# EAGLE board PANEL (EAGLE 6.3)
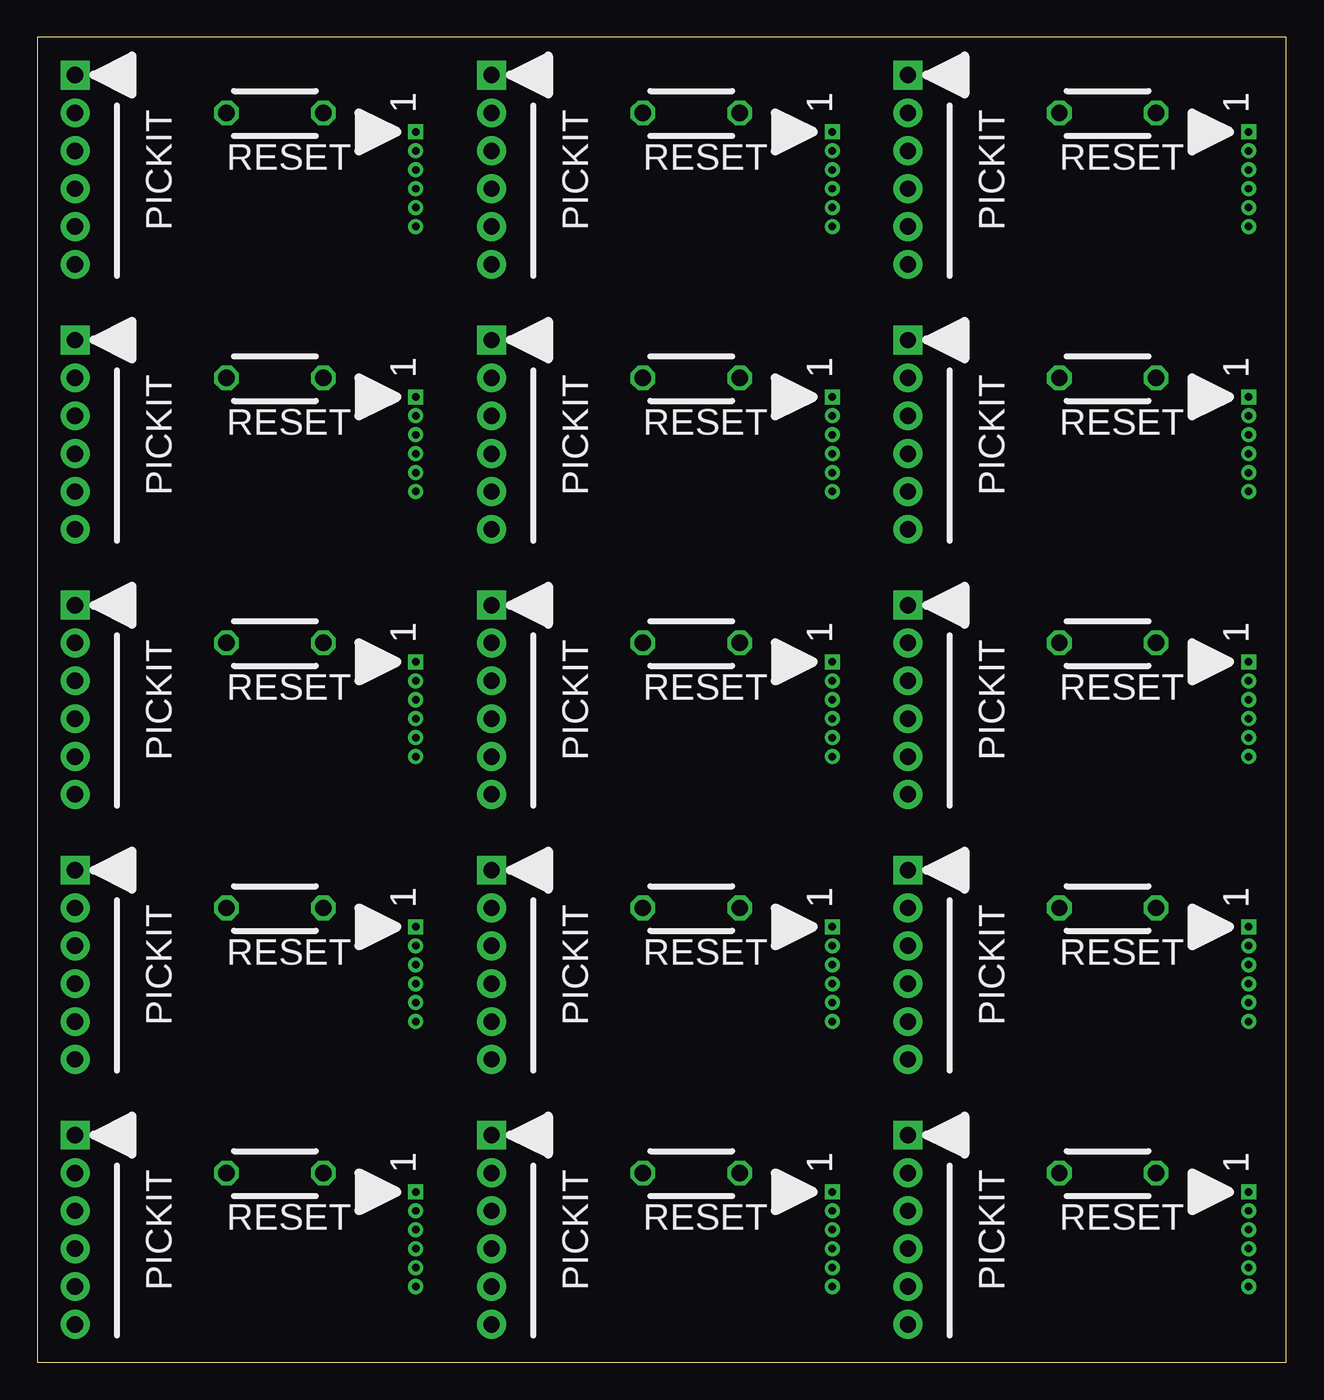
[diagram p0: board, top side]
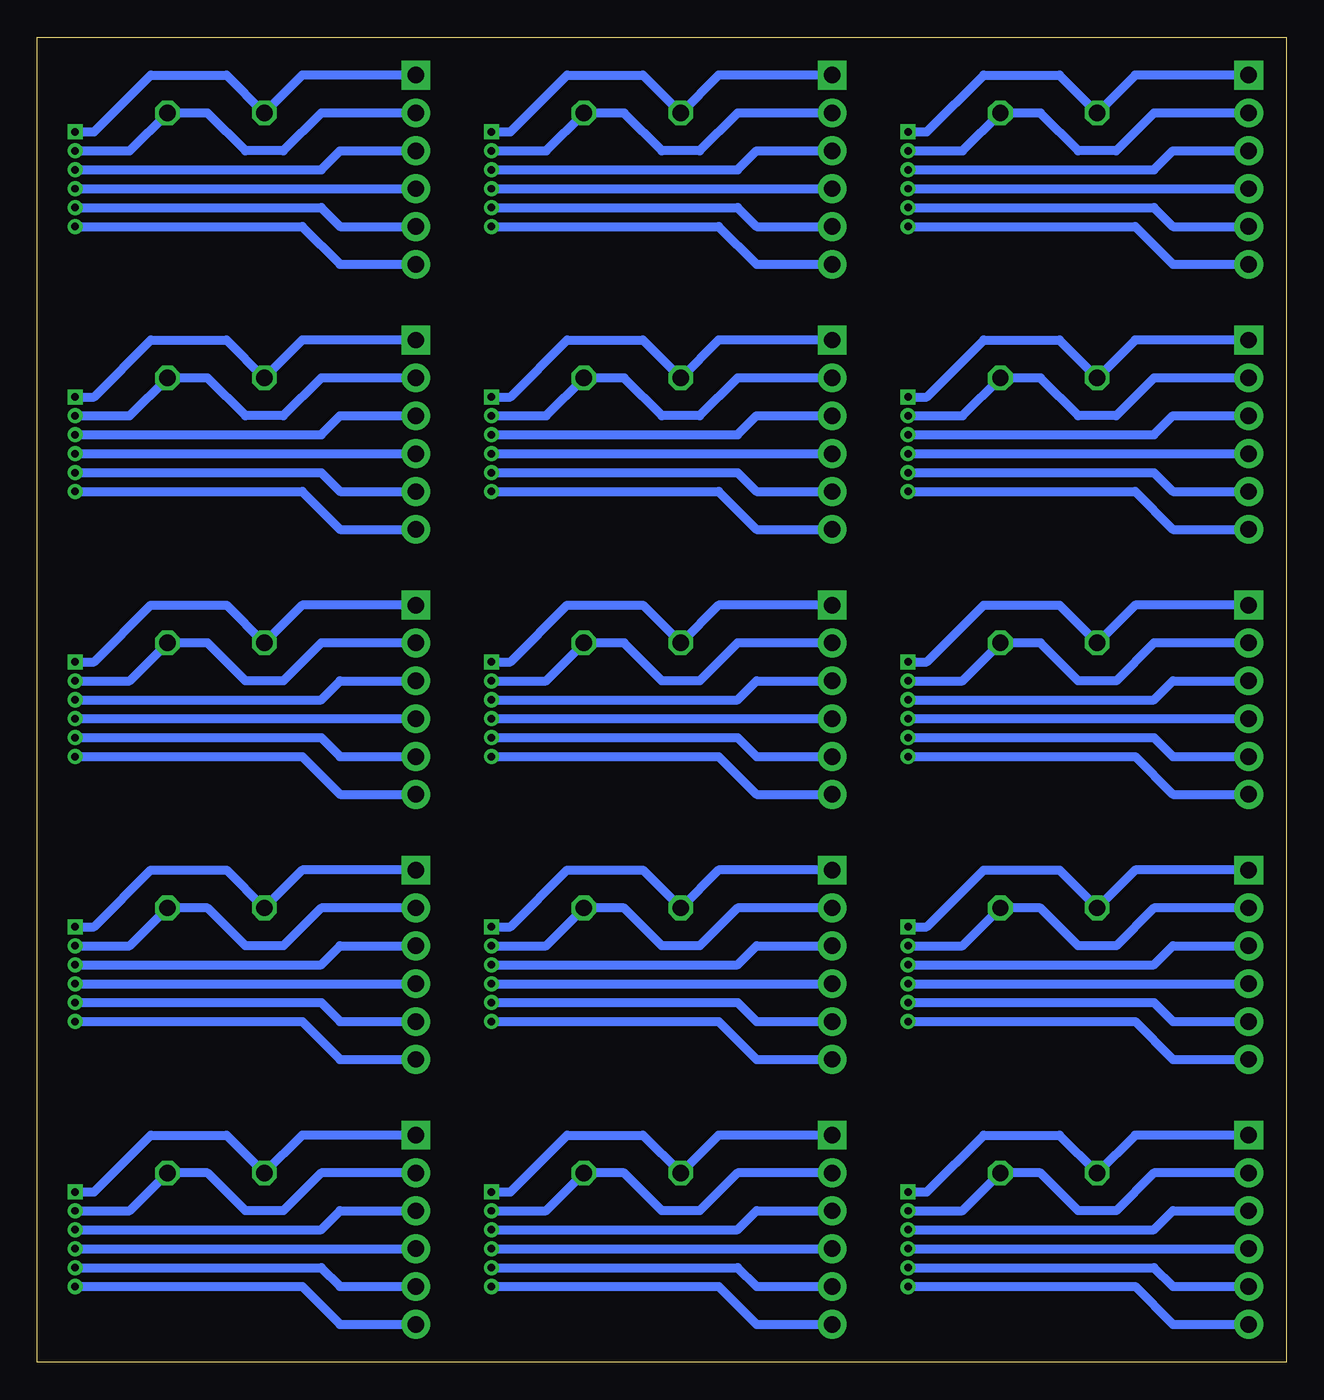
[diagram p1: board, bottom side, seen from below]

Size 83.82 x 88.9 mm. Coordinates in mm from the lower left corner, seen from the top.
Outline: 0,0 83.82,0 83.82,88.9 0,88.9 0,0
Copper layers (1*16): Top 0.035mm / dielectric 1.5mm / Bottom 0.035mm
Design rules "default": minimum track width 10mil, minimum drill 24mil, track to track 8mil, track to pad 8mil, pad to pad 8mil, via to via 8mil, smd to smd 8mil, copper to edge 40mil, drill to drill 8mil, minimum pad ring 10mil, minimum via ring 8mil, stop-mask expansion 4mil, vias tented up to drill 0mil, thermal gap 10mil

## Footprints (pad centres in the part's own frame; a part is rotated, then mirrored left to right if it is on the bottom)
3X6MM = drill 1.1 octagon: 1 0,0; 2 6.5,0
PINS_6_1MM27 = drill 0.5 square: 1 0,0 | drill 0.5: 2 1.27,0; 3 2.54,0; 4 3.81,0; 5 5.08,0; 6 6.35,0
PINS_6_PICKIT3_TEXT = drill 1.1 pad 1.93 square: 1 0,0 | drill 1.1 pad 1.93: 2 0,-2.54; 3 0,-5.08; 4 0,-7.62; 5 0,-10.16; 6 0,-12.7

## Placement (x,y rotation side)
RESET  [3X6MM]  12.7,12.7 0 top
RESET1  [3X6MM]  12.7,30.48 0 top
RESET2  [3X6MM]  12.7,48.26 0 top
RESET3  [3X6MM]  12.7,66.04 0 top
RESET4  [3X6MM]  12.7,83.82 0 top
RESET5  [3X6MM]  40.64,12.7 0 top
RESET6  [3X6MM]  40.64,30.48 0 top
RESET7  [3X6MM]  40.64,48.26 0 top
RESET8  [3X6MM]  40.64,66.04 0 top
RESET9  [3X6MM]  40.64,83.82 0 top
RESET10  [3X6MM]  68.58,12.7 0 top
RESET11  [3X6MM]  68.58,30.48 0 top
RESET12  [3X6MM]  68.58,48.26 0 top
RESET13  [3X6MM]  68.58,66.04 0 top
RESET14  [3X6MM]  68.58,83.82 0 top
U$1  PICKIT3/1.27  [PINS_6_1MM27]  25.4,29.21 270 top
U$2  PICKIT3/1.27  [PINS_6_1MM27]  25.4,11.43 270 top
U$3  PICKIT  [PINS_6_PICKIT3_TEXT]  2.54,15.24 0 top
U$4  PICKIT  [PINS_6_PICKIT3_TEXT]  2.54,33.02 0 top
U$5  PICKIT3/1.27  [PINS_6_1MM27]  25.4,46.99 270 top
U$6  PICKIT  [PINS_6_PICKIT3_TEXT]  2.54,50.8 0 top
U$7  PICKIT3/1.27  [PINS_6_1MM27]  25.4,64.77 270 top
U$8  PICKIT  [PINS_6_PICKIT3_TEXT]  2.54,68.58 0 top
U$9  PICKIT3/1.27  [PINS_6_1MM27]  25.4,82.55 270 top
U$10  PICKIT  [PINS_6_PICKIT3_TEXT]  2.54,86.36 0 top
U$11  PICKIT3/1.27  [PINS_6_1MM27]  53.34,11.43 270 top
U$12  PICKIT  [PINS_6_PICKIT3_TEXT]  30.48,15.24 0 top
U$13  PICKIT3/1.27  [PINS_6_1MM27]  53.34,29.21 270 top
U$14  PICKIT  [PINS_6_PICKIT3_TEXT]  30.48,33.02 0 top
U$15  PICKIT3/1.27  [PINS_6_1MM27]  53.34,46.99 270 top
U$16  PICKIT  [PINS_6_PICKIT3_TEXT]  30.48,50.8 0 top
U$17  PICKIT3/1.27  [PINS_6_1MM27]  53.34,64.77 270 top
U$18  PICKIT  [PINS_6_PICKIT3_TEXT]  30.48,68.58 0 top
U$19  PICKIT3/1.27  [PINS_6_1MM27]  53.34,82.55 270 top
U$20  PICKIT  [PINS_6_PICKIT3_TEXT]  30.48,86.36 0 top
U$21  PICKIT3/1.27  [PINS_6_1MM27]  81.28,11.43 270 top
U$22  PICKIT  [PINS_6_PICKIT3_TEXT]  58.42,15.24 0 top
U$23  PICKIT3/1.27  [PINS_6_1MM27]  81.28,29.21 270 top
U$24  PICKIT  [PINS_6_PICKIT3_TEXT]  58.42,33.02 0 top
U$25  PICKIT3/1.27  [PINS_6_1MM27]  81.28,46.99 270 top
U$26  PICKIT  [PINS_6_PICKIT3_TEXT]  58.42,50.8 0 top
U$27  PICKIT3/1.27  [PINS_6_1MM27]  81.28,64.77 270 top
U$28  PICKIT  [PINS_6_PICKIT3_TEXT]  58.42,68.58 0 top
U$29  PICKIT3/1.27  [PINS_6_1MM27]  81.28,82.55 270 top
U$30  PICKIT  [PINS_6_PICKIT3_TEXT]  58.42,86.36 0 top

## Library data of the parts
RESET RESET1-RESET14 U$1-U$30 = nolan-utsa

## Nets
N$1: RESET.1 U$2.1 U$3.1
N$2: RESET.2 U$2.2 U$3.2
N$3: U$2.3 U$3.3
N$4: U$2.4 U$3.4
N$5: U$2.5 U$3.5
N$6: U$2.6 U$3.6
N$7: RESET1.1 U$1.1 U$4.1
N$8: RESET1.2 U$1.2 U$4.2
N$9: U$1.3 U$4.3
N$10: U$1.4 U$4.4
N$11: U$1.5 U$4.5
N$12: U$1.6 U$4.6
N$13: RESET2.1 U$5.1 U$6.1
N$14: RESET2.2 U$5.2 U$6.2
N$15: U$5.3 U$6.3
N$16: U$5.4 U$6.4
N$17: U$5.5 U$6.5
N$18: U$5.6 U$6.6
N$19: RESET3.1 U$7.1 U$8.1
N$20: RESET3.2 U$7.2 U$8.2
N$21: U$7.3 U$8.3
N$22: U$7.4 U$8.4
N$23: U$7.5 U$8.5
N$24: U$7.6 U$8.6
N$25: RESET4.1 U$9.1 U$10.1
N$26: RESET4.2 U$9.2 U$10.2
N$27: U$9.3 U$10.3
N$28: U$9.4 U$10.4
N$29: U$9.5 U$10.5
N$30: U$9.6 U$10.6
N$31: RESET5.1 U$11.1 U$12.1
N$32: RESET5.2 U$11.2 U$12.2
N$33: U$11.3 U$12.3
N$34: U$11.4 U$12.4
N$35: U$11.5 U$12.5
N$36: U$11.6 U$12.6
N$37: RESET6.1 U$13.1 U$14.1
N$38: RESET6.2 U$13.2 U$14.2
N$39: U$13.3 U$14.3
N$40: U$13.4 U$14.4
N$41: U$13.5 U$14.5
N$42: U$13.6 U$14.6
N$43: RESET7.1 U$15.1 U$16.1
N$44: RESET7.2 U$15.2 U$16.2
N$45: U$15.3 U$16.3
N$46: U$15.4 U$16.4
N$47: U$15.5 U$16.5
N$48: U$15.6 U$16.6
N$49: RESET8.1 U$17.1 U$18.1
N$50: RESET8.2 U$17.2 U$18.2
N$51: U$17.3 U$18.3
N$52: U$17.4 U$18.4
N$53: U$17.5 U$18.5
N$54: U$17.6 U$18.6
N$55: RESET9.1 U$19.1 U$20.1
N$56: RESET9.2 U$19.2 U$20.2
N$57: U$19.3 U$20.3
N$58: U$19.4 U$20.4
N$59: U$19.5 U$20.5
N$60: U$19.6 U$20.6
N$61: RESET10.1 U$21.1 U$22.1
N$62: RESET10.2 U$21.2 U$22.2
N$63: U$21.3 U$22.3
N$64: U$21.4 U$22.4
N$65: U$21.5 U$22.5
N$66: U$21.6 U$22.6
N$67: RESET11.1 U$23.1 U$24.1
N$68: RESET11.2 U$23.2 U$24.2
N$69: U$23.3 U$24.3
N$70: U$23.4 U$24.4
N$71: U$23.5 U$24.5
N$72: U$23.6 U$24.6
N$73: RESET12.1 U$25.1 U$26.1
N$74: RESET12.2 U$25.2 U$26.2
N$75: U$25.3 U$26.3
N$76: U$25.4 U$26.4
N$77: U$25.5 U$26.5
N$78: U$25.6 U$26.6
N$79: RESET13.1 U$27.1 U$28.1
N$80: RESET13.2 U$27.2 U$28.2
N$81: U$27.3 U$28.3
N$82: U$27.4 U$28.4
N$83: U$27.5 U$28.5
N$84: U$27.6 U$28.6
N$85: RESET14.1 U$29.1 U$30.1
N$86: RESET14.2 U$29.2 U$30.2
N$87: U$29.3 U$30.3
N$88: U$29.4 U$30.4
N$89: U$29.5 U$30.5
N$90: U$29.6 U$30.6

## Tracks (layer width: path | path; a pad name or v marks a point on that pad's centre or on a via)
N$1
  Bottom 0.61: U$3.1 10.16,15.24 RESET.1 15.24,15.24 20.32,15.24 24.13,11.43 U$2.1
N$2
  Bottom 0.61: U$3.2 8.89,12.7 11.43,10.16 13.97,10.16 16.51,12.7 RESET.2 21.74,10.16 U$2.2
N$3
  Bottom 0.61: U$2.3 8.89,8.89 7.62,10.16 U$3.3
N$4
  Bottom 0.61: U$2.4 U$3.4
N$5
  Bottom 0.61: U$2.5 8.89,6.35 7.62,5.08 U$3.5
N$6
  Bottom 0.61: U$2.6 10.16,5.08 7.62,2.54 U$3.6
N$7
  Bottom 0.61: U$4.1 10.16,33.02 RESET1.1 15.24,33.02 20.32,33.02 24.13,29.21 U$1.1
N$8
  Bottom 0.61: U$4.2 8.89,30.48 11.43,27.94 13.97,27.94 16.51,30.48 RESET1.2 21.74,27.94 U$1.2
N$9
  Bottom 0.61: U$1.3 8.89,26.67 7.62,27.94 U$4.3
N$10
  Bottom 0.61: U$1.4 U$4.4
N$11
  Bottom 0.61: U$1.5 8.89,24.13 7.62,22.86 U$4.5
N$12
  Bottom 0.61: U$1.6 10.16,22.86 7.62,20.32 U$4.6
N$13
  Bottom 0.61: U$6.1 10.16,50.8 RESET2.1 15.24,50.8 20.32,50.8 24.13,46.99 U$5.1
N$14
  Bottom 0.61: U$6.2 8.89,48.26 11.43,45.72 13.97,45.72 16.51,48.26 RESET2.2 21.74,45.72 U$5.2
N$15
  Bottom 0.61: U$5.3 8.89,44.45 7.62,45.72 U$6.3
N$16
  Bottom 0.61: U$5.4 U$6.4
N$17
  Bottom 0.61: U$5.5 8.89,41.91 7.62,40.64 U$6.5
N$18
  Bottom 0.61: U$5.6 10.16,40.64 7.62,38.1 U$6.6
N$19
  Bottom 0.61: U$8.1 10.16,68.58 RESET3.1 15.24,68.58 20.32,68.58 24.13,64.77 U$7.1
N$20
  Bottom 0.61: U$8.2 8.89,66.04 11.43,63.5 13.97,63.5 16.51,66.04 RESET3.2 21.74,63.5 U$7.2
N$21
  Bottom 0.61: U$7.3 8.89,62.23 7.62,63.5 U$8.3
N$22
  Bottom 0.61: U$7.4 U$8.4
N$23
  Bottom 0.61: U$7.5 8.89,59.69 7.62,58.42 U$8.5
N$24
  Bottom 0.61: U$7.6 10.16,58.42 7.62,55.88 U$8.6
N$25
  Bottom 0.61: U$10.1 10.16,86.36 RESET4.1 15.24,86.36 20.32,86.36 24.13,82.55 U$9.1
N$26
  Bottom 0.61: U$10.2 8.89,83.82 11.43,81.28 13.97,81.28 16.51,83.82 RESET4.2 21.74,81.28 U$9.2
N$27
  Bottom 0.61: U$9.3 8.89,80.01 7.62,81.28 U$10.3
N$28
  Bottom 0.61: U$9.4 U$10.4
N$29
  Bottom 0.61: U$9.5 8.89,77.47 7.62,76.2 U$10.5
N$30
  Bottom 0.61: U$9.6 10.16,76.2 7.62,73.66 U$10.6
N$31
  Bottom 0.61: U$12.1 38.1,15.24 RESET5.1 43.18,15.24 48.26,15.24 52.07,11.43 U$11.1
N$32
  Bottom 0.61: U$12.2 36.83,12.7 39.37,10.16 41.91,10.16 44.45,12.7 RESET5.2 49.68,10.16 U$11.2
N$33
  Bottom 0.61: U$11.3 36.83,8.89 35.56,10.16 U$12.3
N$34
  Bottom 0.61: U$11.4 U$12.4
N$35
  Bottom 0.61: U$11.5 36.83,6.35 35.56,5.08 U$12.5
N$36
  Bottom 0.61: U$11.6 38.1,5.08 35.56,2.54 U$12.6
N$37
  Bottom 0.61: U$14.1 38.1,33.02 RESET6.1 43.18,33.02 48.26,33.02 52.07,29.21 U$13.1
N$38
  Bottom 0.61: U$14.2 36.83,30.48 39.37,27.94 41.91,27.94 44.45,30.48 RESET6.2 49.68,27.94 U$13.2
N$39
  Bottom 0.61: U$13.3 36.83,26.67 35.56,27.94 U$14.3
N$40
  Bottom 0.61: U$13.4 U$14.4
N$41
  Bottom 0.61: U$13.5 36.83,24.13 35.56,22.86 U$14.5
N$42
  Bottom 0.61: U$13.6 38.1,22.86 35.56,20.32 U$14.6
N$43
  Bottom 0.61: U$16.1 38.1,50.8 RESET7.1 43.18,50.8 48.26,50.8 52.07,46.99 U$15.1
N$44
  Bottom 0.61: U$16.2 36.83,48.26 39.37,45.72 41.91,45.72 44.45,48.26 RESET7.2 49.68,45.72 U$15.2
N$45
  Bottom 0.61: U$15.3 36.83,44.45 35.56,45.72 U$16.3
N$46
  Bottom 0.61: U$15.4 U$16.4
N$47
  Bottom 0.61: U$15.5 36.83,41.91 35.56,40.64 U$16.5
N$48
  Bottom 0.61: U$15.6 38.1,40.64 35.56,38.1 U$16.6
N$49
  Bottom 0.61: U$18.1 38.1,68.58 RESET8.1 43.18,68.58 48.26,68.58 52.07,64.77 U$17.1
N$50
  Bottom 0.61: U$18.2 36.83,66.04 39.37,63.5 41.91,63.5 44.45,66.04 RESET8.2 49.68,63.5 U$17.2
N$51
  Bottom 0.61: U$17.3 36.83,62.23 35.56,63.5 U$18.3
N$52
  Bottom 0.61: U$17.4 U$18.4
N$53
  Bottom 0.61: U$17.5 36.83,59.69 35.56,58.42 U$18.5
N$54
  Bottom 0.61: U$17.6 38.1,58.42 35.56,55.88 U$18.6
N$55
  Bottom 0.61: U$20.1 38.1,86.36 RESET9.1 43.18,86.36 48.26,86.36 52.07,82.55 U$19.1
N$56
  Bottom 0.61: U$20.2 36.83,83.82 39.37,81.28 41.91,81.28 44.45,83.82 RESET9.2 49.68,81.28 U$19.2
N$57
  Bottom 0.61: U$19.3 36.83,80.01 35.56,81.28 U$20.3
N$58
  Bottom 0.61: U$19.4 U$20.4
N$59
  Bottom 0.61: U$19.5 36.83,77.47 35.56,76.2 U$20.5
N$60
  Bottom 0.61: U$19.6 38.1,76.2 35.56,73.66 U$20.6
N$61
  Bottom 0.61: U$22.1 66.04,15.24 RESET10.1 71.12,15.24 76.2,15.24 80.01,11.43 U$21.1
N$62
  Bottom 0.61: U$22.2 64.77,12.7 67.31,10.16 69.85,10.16 72.39,12.7 RESET10.2 77.62,10.16 U$21.2
N$63
  Bottom 0.61: U$21.3 64.77,8.89 63.5,10.16 U$22.3
N$64
  Bottom 0.61: U$21.4 U$22.4
N$65
  Bottom 0.61: U$21.5 64.77,6.35 63.5,5.08 U$22.5
N$66
  Bottom 0.61: U$21.6 66.04,5.08 63.5,2.54 U$22.6
N$67
  Bottom 0.61: U$24.1 66.04,33.02 RESET11.1 71.12,33.02 76.2,33.02 80.01,29.21 U$23.1
N$68
  Bottom 0.61: U$24.2 64.77,30.48 67.31,27.94 69.85,27.94 72.39,30.48 RESET11.2 77.62,27.94 U$23.2
N$69
  Bottom 0.61: U$23.3 64.77,26.67 63.5,27.94 U$24.3
N$70
  Bottom 0.61: U$23.4 U$24.4
N$71
  Bottom 0.61: U$23.5 64.77,24.13 63.5,22.86 U$24.5
N$72
  Bottom 0.61: U$23.6 66.04,22.86 63.5,20.32 U$24.6
N$73
  Bottom 0.61: U$26.1 66.04,50.8 RESET12.1 71.12,50.8 76.2,50.8 80.01,46.99 U$25.1
N$74
  Bottom 0.61: U$26.2 64.77,48.26 67.31,45.72 69.85,45.72 72.39,48.26 RESET12.2 77.62,45.72 U$25.2
N$75
  Bottom 0.61: U$25.3 64.77,44.45 63.5,45.72 U$26.3
N$76
  Bottom 0.61: U$25.4 U$26.4
N$77
  Bottom 0.61: U$25.5 64.77,41.91 63.5,40.64 U$26.5
N$78
  Bottom 0.61: U$25.6 66.04,40.64 63.5,38.1 U$26.6
N$79
  Bottom 0.61: U$28.1 66.04,68.58 RESET13.1 71.12,68.58 76.2,68.58 80.01,64.77 U$27.1
N$80
  Bottom 0.61: U$28.2 64.77,66.04 67.31,63.5 69.85,63.5 72.39,66.04 RESET13.2 77.62,63.5 U$27.2
N$81
  Bottom 0.61: U$27.3 64.77,62.23 63.5,63.5 U$28.3
N$82
  Bottom 0.61: U$27.4 U$28.4
N$83
  Bottom 0.61: U$27.5 64.77,59.69 63.5,58.42 U$28.5
N$84
  Bottom 0.61: U$27.6 66.04,58.42 63.5,55.88 U$28.6
N$85
  Bottom 0.61: U$30.1 66.04,86.36 RESET14.1 71.12,86.36 76.2,86.36 80.01,82.55 U$29.1
N$86
  Bottom 0.61: U$30.2 64.77,83.82 67.31,81.28 69.85,81.28 72.39,83.82 RESET14.2 77.62,81.28 U$29.2
N$87
  Bottom 0.61: U$29.3 64.77,80.01 63.5,81.28 U$30.3
N$88
  Bottom 0.61: U$29.4 U$30.4
N$89
  Bottom 0.61: U$29.5 64.77,77.47 63.5,76.2 U$30.5
N$90
  Bottom 0.61: U$29.6 66.04,76.2 63.5,73.66 U$30.6

## Text on the board
tPlace: 1 | 1 | 1 | RESET | RESET | RESET | 1 | 1 | 1 | RESET | RESET | RESET | 1 | 1 | 1 | RESET | RESET | RESET | 1 | 1 | 1 | RESET | RESET | RESET | 1 | 1 | 1 | RESET | RESET | RESET